# EAGLE board CAN shield rev1 (EAGLE 8.1.0)
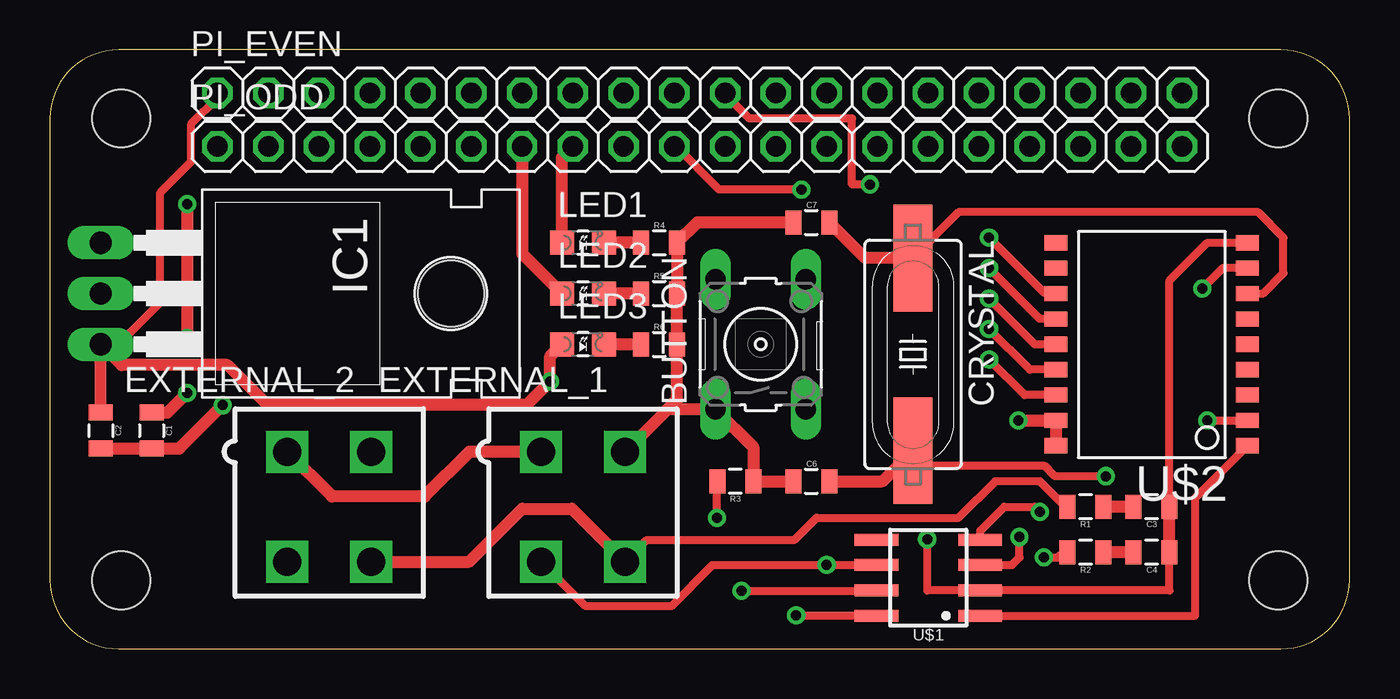
[diagram p0: board, top side]
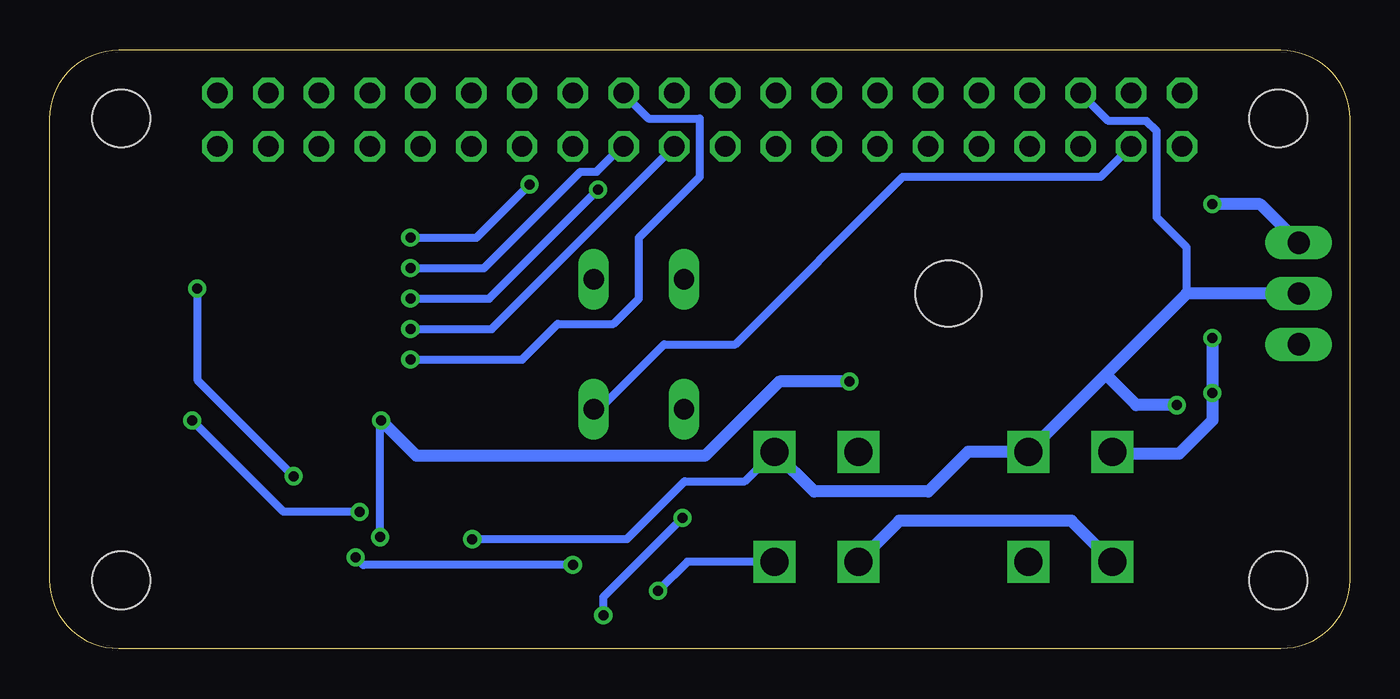
[diagram p1: board, bottom side, seen from below]

Size 65.02 x 29.97 mm. Coordinates in mm from the lower left corner, seen from the top.
Outline: 3.43,0 61.59,0 arc90 65.02,3.43 65.02,26.54 arc90 61.59,29.97 3.43,29.97 arc90 0,26.54 0,3.43 arc90 3.43,0
Copper layers (1*16): Top 0.035mm / dielectric 1.5mm / Bottom 0.035mm
Design rules "default *": minimum track width 10mil, minimum drill 24mil, track to track 6mil, track to pad 6mil, pad to pad 6mil, via to via 6mil, smd to smd 6mil, copper to edge 40mil, drill to drill 8mil, minimum pad ring 10mil, minimum via ring 8mil, stop-mask expansion 4mil, vias tented up to drill 0mil, thermal gap 10mil
Holes 2.9 mm at 3.56,26.54 3.56,3.43 61.47,3.43 61.47,26.54

## Footprints (pad centres in the part's own frame; a part is rotated, then mirrored left to right if it is on the bottom)
B3F-10XX = drill 1.016 long: 1 -3.251,2.261; 2 3.251,2.261; 3 -3.251,-2.261; 4 3.251,-2.261
0805 = smd 0.8 x 1.2: 1 -0.9,0; 2 0.9,0
HC49UP = smd 5.334 x 1.93: 1 -4.826,0; 2 4.826,0
MINIFIT_5566-4 = drill 1.4 square: 1 2.1,-2.75; 2 -2.1,-2.75; 3 2.1,2.75; 4 -2.1,2.75
TO-220-H = drill 1.118 long: 1 -2.54,-6.35; 2 0,-6.35; 3 2.54,-6.35 | hole 3.302: 0,11.176
LED-805 = smd 1.2 x 1.2: A 0,-1.05; C 0,1.05
1X20 = drill 1.016 octagon: 1 0,0; 2 2.54,0; 3 5.08,0; 4 7.62,0; 5 10.16,0; 6 12.7,0; 7 15.24,0; 8 17.78,0; 9 20.32,0; 10 22.86,0; 11 25.4,0; 12 27.94,0; 13 30.48,0; 14 33.02,0; 15 35.56,0; 16 38.1,0; 17 40.64,0; 18 43.18,0; 19 45.72,0; 20 48.26,0
SOIC-08 = smd 0.6 x 2.2: 1 -1.905,-2.6; 2 -0.635,-2.6; 3 0.635,-2.6; 4 1.905,-2.6; 5 1.905,2.6; 6 0.635,2.6; 7 -0.635,2.6; 8 -1.905,2.6
SOIC-18W = smd 0.762 x 1.143: 1 -5.08,-4.788; 2 -3.81,-4.788; 3 -2.54,-4.788; 4 -1.27,-4.788; 5 0,-4.788; 6 1.27,-4.788; 7 2.54,-4.788; 8 3.81,-4.788; 9 5.08,-4.788; 10 5.08,4.788; 11 3.81,4.788; 12 2.54,4.788; 13 1.27,4.788; 14 0,4.788; 15 -1.27,4.788; 16 -2.54,4.788; 17 -3.81,4.788; 18 -5.08,4.788

## Placement (x,y rotation side)
BUTTON  [B3F-10XX]  35.56,15.24 90 top
C1  .33uF  [0805]  5.08,10.92 270 top
C2  .1uF  [0805]  2.54,10.92 270 top
C3  560pF  [0805]  55.12,7.11 180 top
C4  560pF  [0805]  55.12,4.83 180 top
C6  22pF  [0805]  38.1,8.38 0 top
C7  22pF  [0805]  38.1,21.34 0 top
CRYSTAL  16MHz  [HC49UP]  43.18,14.73 270 top
EXTERNAL_1  [MINIFIT_5566-4]  26.67,7.11 180 top
EXTERNAL_2  [MINIFIT_5566-4]  13.97,7.11 180 top
IC1  [TO-220-H]  8.89,17.78 270 top
LED1  [LED-805]  26.67,20.32 270 top
LED2  [LED-805]  26.67,17.78 270 top
LED3  [LED-805]  26.67,15.24 270 top
PI_EVEN  [1X20]  8.38,27.81 0 top
PI_ODD  [1X20]  8.38,25.15 0 top
R1  100  [0805]  51.82,7.11 180 top
R2  100  [0805]  51.82,4.83 180 top
R3  4.7k  [0805]  34.29,8.38 180 top
R4  150  [0805]  30.48,20.32 0 top
R5  150  [0805]  30.48,17.78 0 top
R6  150  [0805]  30.48,15.24 0 top
U$1  MCP2551  [SOIC-08]  43.94,3.56 90 top
U$2  MCP2515SMD  [SOIC-18W]  55.12,15.24 90 top

## Library data of the parts
BUTTON = HyTechDevices; MPN: B3F-1000; OC_FARNELL: 176432; OC_NEWARK: 36M3542
C1-C4 C6 C7 IC1 LED1-LED3 PI_EVEN PI_ODD R1-R6 U$1 U$2 = HyTechDevices
CRYSTAL = SparkFun-FreqCtrl
EXTERNAL_1 EXTERNAL_2 = HyTechDevices; OC_FARNELL: unknown; OC_NEWARK: unknown

## Nets
+5V: C2.1 IC1.3 LED3.A PI_EVEN.1 U$1.3 U$2.17 U$2.18
BUT: BUTTON.3 PI_ODD.2
CAN-H: EXTERNAL_1.4 EXTERNAL_2.4 R1.2 U$1.7
CAN-L: EXTERNAL_1.3 EXTERNAL_2.3 R2.2 U$1.6
CS: PI_EVEN.12 U$2.16
GND: BUTTON.1 C1.2 C2.2 C3.1 C4.1 C6.1 C7.1 EXTERNAL_1.2 EXTERNAL_2.2 IC1.2 PI_EVEN.3 R3.1 R4.2 R5.2 R6.2 U$1.2 U$2.9
INT: PI_EVEN.11 U$2.12
LED1: LED1.A PI_ODD.8
LED2: LED2.A PI_ODD.7
MISO: PI_ODD.11 U$2.15
MOSI: PI_ODD.10 U$2.14
N$1: LED1.C R4.1
N$2: LED2.C R5.1
N$5: C1.1 EXTERNAL_1.1 EXTERNAL_2.1 IC1.1
N$7: LED3.C R6.1
N$11: C6.2 CRYSTAL.2 U$2.8
N$12: U$1.1 U$2.1
N$13: U$1.4 U$2.2
N$14: C3.2 R1.1
N$15: C7.2 CRYSTAL.1 U$2.7
N$16: R3.2 U$1.8
N$17: C4.2 R2.1
SCK: PI_ODD.12 U$2.13

## Tracks (layer width: path | path; a pad name or v marks a point on that pad's centre or on a via)
+5V  (via drill 0.5)
  Top 0.406: IC1.3 3.42,15.24 5.52,17.34 5.52,22.83 7.08,24.38 7.08,26.29 8.38,27.59 PI_EVEN.1 | U$1.3 48.13,4.19 48.51,4.57 v48.51,5.59
  Top 0.61: C2.1 IC1.3 3.58,14.2 8.89,14.2 10.9,12.19 23.84,12.19 v25.03,13.38 25.03,14.65 LED3.A | U$2.18 U$2.17 v48.46,11.43
  Bottom 0.406: v48.51,5.59 48.51,11.38 v48.46,11.43
  Bottom 0.61: v25.03,13.38 28.53,13.38 32.26,9.65 46.69,9.65 v48.46,11.43
BUT
  Bottom 0.406: BUTTON.3 37.54,11.99 34.29,15.24 30.73,15.24 22.35,23.62 12.45,23.62 PI_ODD.2
CAN-H  (via drill 0.5)
  Top 0.406: v34.59,2.9 41.32,2.9 U$1.7 | EXTERNAL_1.4 29.86,5.45 37.25,5.45 38.35,6.55 45.47,6.55 47.3,8.38 49.53,8.38 50.8,7.11 R1.2
  Top 0.61: EXTERNAL_2.4 20.97,4.36 23.62,7.01 26.12,7.01 EXTERNAL_1.4
  Bottom 0.406: EXTERNAL_1.4 33.13,4.36 v34.59,2.9
CAN-L  (via drill 0.5)
  Top 0.406: U$1.6 v38.86,4.19 33.15,4.19 31.09,2.13 26.8,2.13 EXTERNAL_1.3 | R2.2 50.58,4.71 50.44,4.57 v49.73,4.57
  Bottom 0.406: v38.86,4.19 49.35,4.19 v49.73,4.57
  Bottom 0.61: EXTERNAL_2.3 13.91,6.4 22.53,6.4 EXTERNAL_1.3
CS  (via drill 0.5)
  Top 0.406: U$2.16 48.77,12.7 v46.99,14.48
  Bottom 0.406: PI_EVEN.12 36.32,27.78 35.08,26.54 32.51,26.54 32.51,23.62 35.56,20.57 35.56,17.53 36.83,16.26 39.62,16.26 41.4,14.48 v46.99,14.48
GND  (via drill 0.5)
  Top 0.406: C4.1 56.02,2.92 U$1.2 43.89,2.92 v43.89,5.49 | C3.1 56.02,18.43 57.91,20.32 U$2.9
  Top 0.61: C2.2 C1.2 6.47,10.02 v8.64,12.19 | C6.1 R3.1 35.19,10.1 BUTTON.1 30.9,11.99 | C4.1 C3.1 | C7.1 32.4,21.34 R4.2 R5.2 R6.2 31.38,12.47 30.9,11.99 | EXTERNAL_1.2 30.9,11.99
  Bottom 0.406: 8.15,17.78 8.15,20.09 9.65,21.59 9.65,25.91 10.16,26.42 12.06,26.42 PI_EVEN.3 | v43.89,5.49 36.17,5.49 33.27,8.38 30.25,8.38 EXTERNAL_1.2
  Bottom 0.61: IC1.2 8.15,17.78 12.2,13.73 | 12.2,13.73 EXTERNAL_2.2 19.09,9.86 21.08,7.87 26.78,7.87 EXTERNAL_1.2 | v8.64,12.19 10.67,12.19 12.2,13.73
INT  (via drill 0.5)
  Top 0.406: U$2.12 49.78,17.78 v46.99,20.57 | v41.02,23.24 40.13,23.24 40.13,26.54 35,26.54 33.78,27.76 PI_EVEN.11
  Bottom 0.406: v46.99,20.57 43.69,20.57 v41.02,23.24
LED1
  Top 0.61: LED1.A 25.62,24.6 PI_ODD.8
LED2
  Top 0.61: PI_ODD.7 23.62,19.78 LED2.A
MISO  (via drill 0.5)
  Top 0.406: U$2.15 49.02,13.97 v46.99,16
  Bottom 0.406: PI_ODD.11 42.93,16 v46.99,16
MOSI  (via drill 0.5)
  Top 0.406: U$2.14 49.28,15.24 v46.99,17.53 | v37.59,22.99 33.47,22.99 31.31,25.15 PI_ODD.10
  Bottom 0.406: v46.99,17.53 43.05,17.53 v37.59,22.99
N$1
  Top 0.61: R4.1 LED1.C
N$2
  Top 0.61: R5.1 LED2.C
N$5  (via drill 0.5)
  Top 0.61: v6.86,22.25 v6.86,15.54 | C1.1 5.88,11.82 v6.86,12.8 | EXTERNAL_1.1 20.99,9.86 18.75,7.62 14.11,7.62 EXTERNAL_2.1
  Bottom 0.61: IC1.1 4.47,22.25 v6.86,22.25 | v6.86,15.54 v6.86,12.8 6.86,11.43 8.53,9.75 11.76,9.75 EXTERNAL_2.1
N$7
  Top 0.61: R6.1 LED3.C
N$11  (via drill 0.5)
  Top 0.406: U$2.8 58.67,19.05 v57.66,18.03 | v52.83,8.64 50.29,8.64 49.78,9.14 43.94,9.14 CRYSTAL.2
  Top 0.61: C6.2 41.66,8.38 CRYSTAL.2
  Bottom 0.406: v57.66,18.03 57.66,13.46 v52.83,8.64
N$12
  Top 0.406: U$1.1 57.3,1.65 57.3,7.56 U$2.1
N$13  (via drill 0.5)
  Top 0.406: U$1.4 46.54,5.9 47.75,7.11 49.28,7.11 v49.53,6.86 | v57.91,11.43 U$2.2
  Bottom 0.406: v49.53,6.86 53.34,6.86 v57.91,11.43
N$14
  Top 0.61: C3.2 R1.1
N$15
  Top 0.406: U$2.7 60.71,17.78 61.72,18.8 61.72,20.57 60.45,21.84 45.47,21.84 CRYSTAL.1
  Top 0.61: CRYSTAL.1 40.78,19.56 C7.2
N$16  (via drill 0.5)
  Top 0.406: U$1.8 37.36,1.65 v37.34,1.68 | v33.38,6.55 33.38,8.37 R3.2
  Bottom 0.406: v37.34,1.68 37.34,2.59 v33.38,6.55
N$17
  Top 0.61: C4.2 R2.1
SCK  (via drill 0.5)
  Top 0.406: U$2.13 49.53,16.51 v46.99,19.05
  Bottom 0.406: v46.99,19.05 43.31,19.05 38.48,23.88 37.66,23.88 36.39,25.15 PI_ODD.12

## Text on the board
tDocu: Nathan Cheek | CAN shield rev1
bDocu: Nothing to see here...